# Altium PCB 8161芯片-FSK调试板V1.26.PcbDoc
Units mil, origin at the board's own origin, x right, y up, seen from the top; angles counter-clockwise.
Board outline 1181.1 x 1181.61 mil, 2 copper layers (Top Layer, Bottom Layer), stack 39.414 mil thick; 63 components, 49 nets, 207 pads, 86 vias.
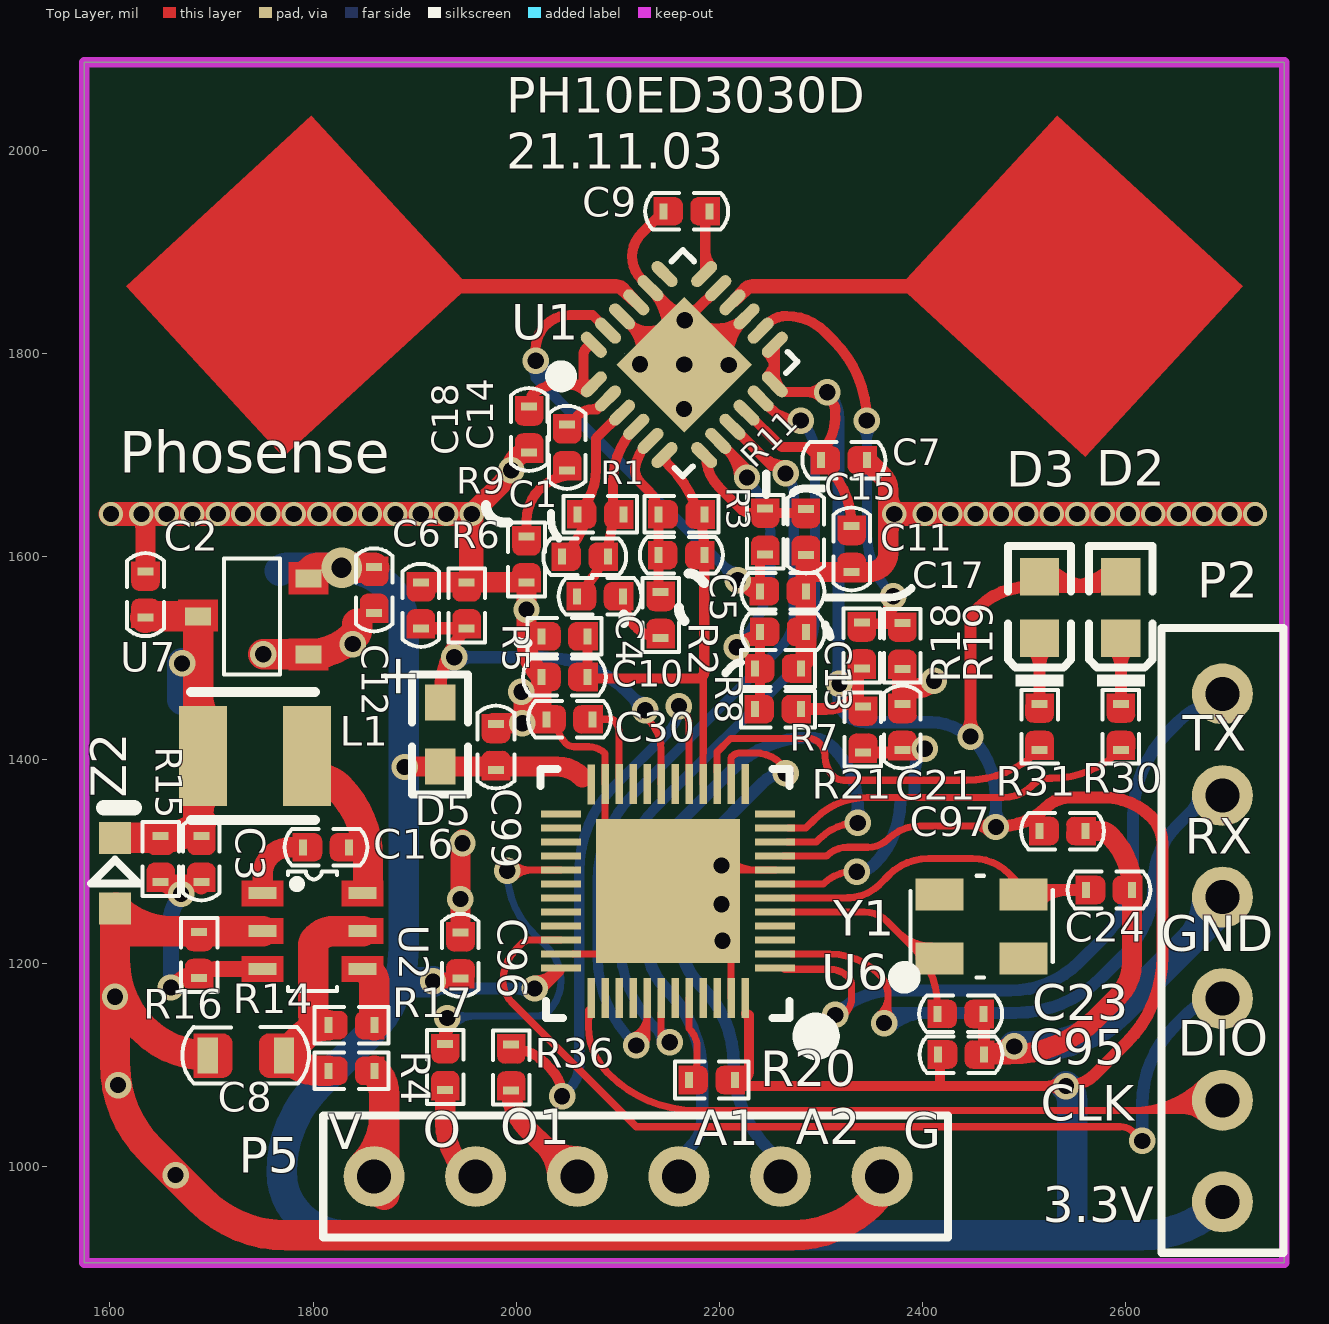
[diagram p0: Top Layer view]
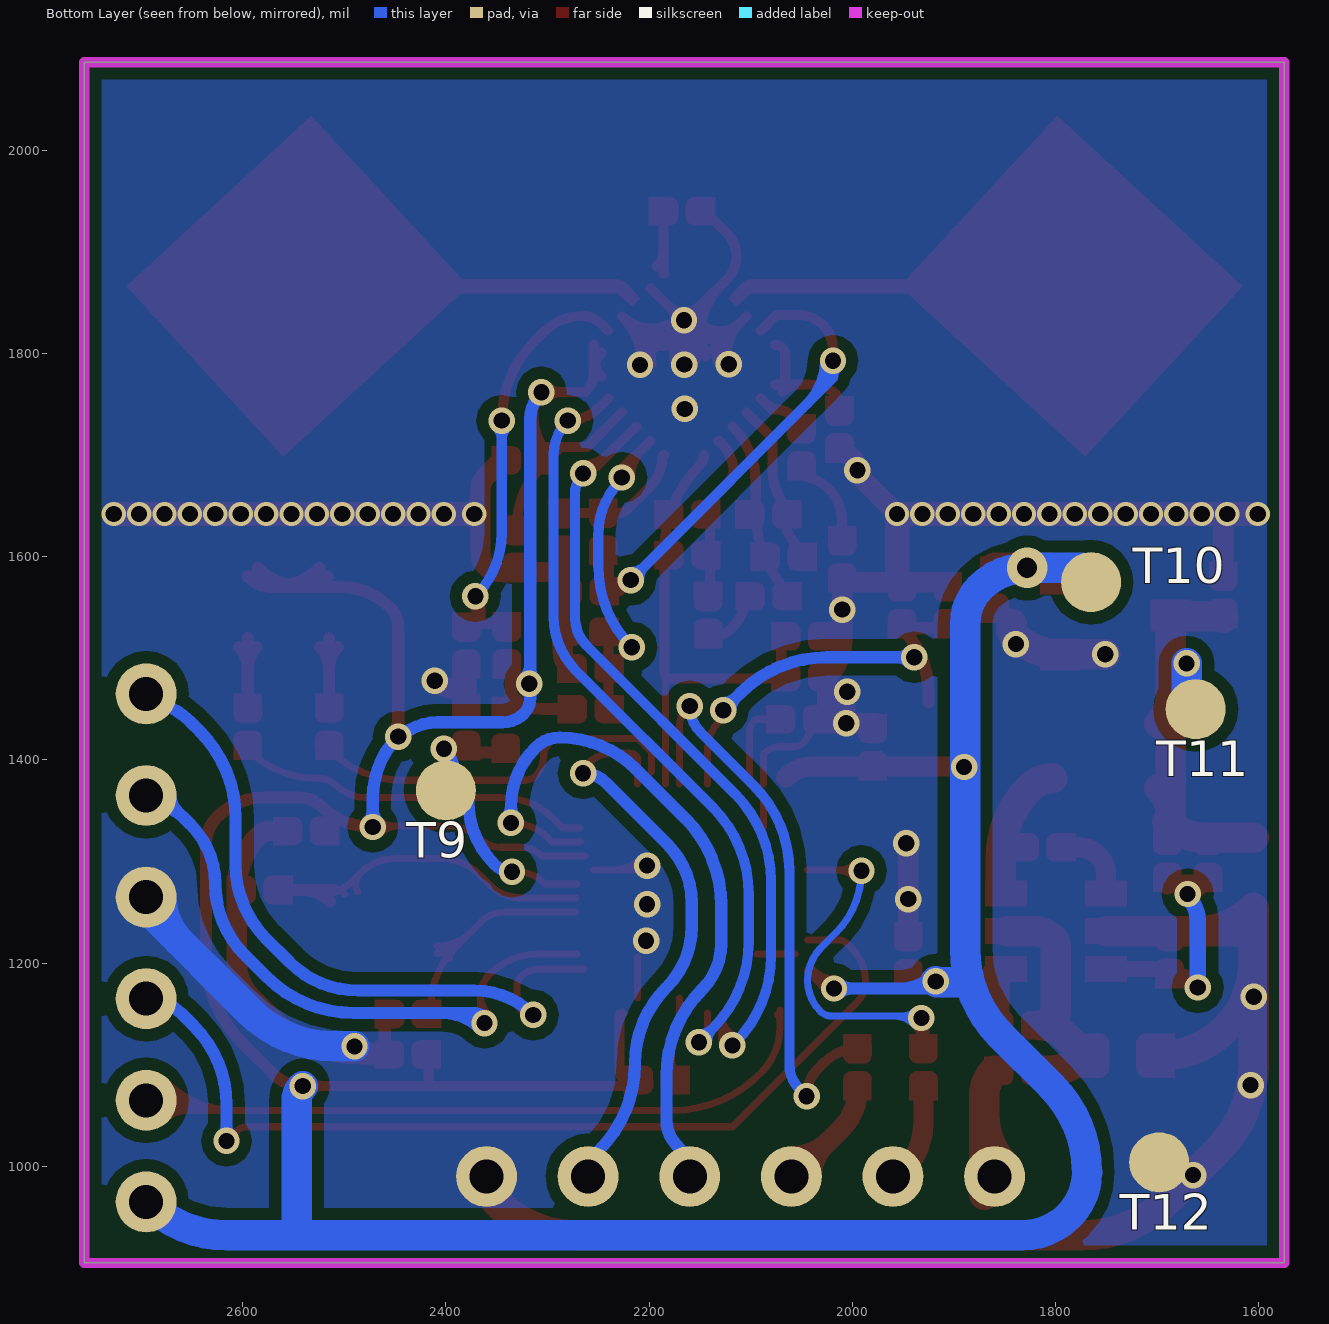
[diagram p1: Bottom Layer view, seen from below]

## Layer stack, top to bottom
Top Layer: signal copper 1.4
Dielectric: core 36.6142, FR-4, Dk 4.8
Bottom Layer: signal copper 1.4

## Board outline
1574.8,2086.61 2755.91,2086.61 2755.91,905 1574.8,905 1574.8,2086.61

## Design rules (kind name [scope] priority, off if disabled: settings)
Clearance [All] p1: gap=6
ComponentClearance [All] p1: gap=10 collisioncheckmode=3 verticalgap=10
PolygonConnect [All] p1: connectstyle=Direct reliefconductorwidth=10 reliefentries=4 polygonreliefangle="90 Angle"
RoutingVias [All] p1: holewidth=28 width=50 viastyle="Through Hole" minholewidth=15 minwidth=26 maxholewidth=28 maxwidth=50
SolderMaskExpansion [All] p1: expansion=4
TestPointUsage [All] p1: valid=0 allowmultiple=FALSE
Testpoint [All] p1: side=15 testpointundercomponent=TRUE minsize=40 maxsize=100 preferedsize=60 minholesize=0 maxholesize=40 preferedholesize=32 testpointgrid=1 style=1023 order=0-112345678
Width [All] p1: maxlimit=30 minlimit=7 preferedwidth=10
18 further rules are at their usual default settings.

## Components (designator, comment, footprint, x,y, rotation, side; value= is the part's Value field where it differs from the comment)
C1 "10nF" C0402#1 2090,1600 r180 top (schematic designator C16)
C2 "10uF" C0402#1 1635,1540 r90 top (schematic designator C16)
C3 "22pF" C0402#1 1690,1280 r90 top (schematic designator C16)
C4 "10uF" C0402#1 2105,1561 r180 top (schematic designator C16)
C5 "51nF" C0402#1 2185,1601.61 r180 top (schematic designator C16)
C6 "0.1uF" C0402#1 1906.1,1529.53 r90 top (schematic designator C16)
C7 "100nF" C0402#1 2345,1695 r180 top (schematic designator C16)
C8 "10uF/16V" C0603 1770.3,1109 r180 top
C9 "10uF" C0402#1 2145,1940 r0 top (schematic designator C16)
C10 "0.1uF" C0402#1 2070,1481.61 r180 top
C11 "10uF" C0402#1 2330,1585 r90 top (schematic designator C16)
C12 "10uF" C0402#1 1860,1590 r270 top (schematic designator C16)
C13 "10uF" C0402#1 2240,1526 r0 top (schematic designator C16)
C14 "10uF" C0402#1 2050,1685 r90 top (schematic designator C16)
C15 "10uF" C0402#1 2285,1647 r270 top (schematic designator C16)
C16 "0.1uF" C0402#1 1835.3,1314 r180 top
C17 "10uF" C0402#1 2285,1566 r180 top (schematic designator C16)
C18 "10uF" C0402#1 2012.61,1702.61 r90 top (schematic designator C16)
C21 "100nF" C0402#2 2380,1455 r270 top
C23 "12pF" C0402#2 2460,1150 r180 top
C24 "12pF" C0402#2 2606,1272 r180 top
C30 "100nF" C0402#2 2075,1440 r180 top
C95 "10uF/6.3V" C0402#2 2415,1110 r0 top
C96 "0.1uF/50V" C0402#2 1945,1185 r90 top
C97 "0.1uF/50V" C0402#2 2515,1330 r0 top
C99 "0.1uF/50V" C0402#2 1980,1390 r90 top
D2 "红灯" LC-0603_LED_S1 2595,1550 r90 top
D3 "绿灯" LC-0603_LED_S1 2515,1550 r90 top
D5 "PT19-21C" LED-0603 1925,1425 r270 top
L1 "PRS3015-100MT" PRS3015 1798,1404 r180 top
P2 "DIP1X6-2.54mm" DIP1X6-2.54 2695,965 r90 top locked
P5 "DIP1X6-2.54mm" DIP1X6-2.54 1860,990 r0 top locked
R1 "100k" R0402#1 2060,1641.61 r0 top (schematic designator R14)
R2 "10k" R0402#1 2142,1520 r90 top (schematic designator R14)
R3 "NC" R0402#1 2140,1641.61 r0 top (schematic designator R14)
R4 "5.6" R0402#1 1860.3,1094 r180 top (schematic designator R14)
R5 "12K" R0402#1 2070,1521.61 r180 top (schematic designator R14)
R6 "47k" R0402#1 1951.1,1529.53 r90 top (schematic designator R14)
R7 "20k" R0402#1 2280,1450 r180 top (schematic designator R14)
R8 "10k" R0402#1 2235,1490 r0 top (schematic designator R14)
R9 "0R" R0402#1 2010,1620 r270 top (schematic designator R14)
R11 "10k" R0402#1 2245,1602 r90 top (schematic designator R14)
R14 "47k" R0402#1 1860.3,1139 r180 top
R15 "25.5k" R0402#1 1650,1280 r90 top
R16 "5.1k" R0402#1 1687.8,1230.66 r270 top
R17 "200" R0402#1 1930,1075 r90 top (schematic designator R14)
R18 "10k/NA" R0402#1 2340,1490 r90 top (schematic designator R14)
R19 "10K/NA" R0402#1 2380,1535 r270 top (schematic designator R14)
R20 "4.7K" R0402#2 2215,1085 r180 top
R21 "4.7KΩ" R0402#2 2341.14,1407.2 r90 top
R30 "1KΩ" R0402#2 2595,1410 r90 top
R31 "1KΩ" R0402#2 2515,1410 r90 top
R36 "100R" R0402#2 1995,1120 r270 top
T9 "" TestPoints 2405,1365 r180 bottom
T10 "" TestPoints 1770,1570 r180 bottom (schematic designator T9)
T11 "" TestPoints 1667,1445 r180 bottom (schematic designator T9)
T12 "" TestPoints 1703,999 r180 bottom (schematic designator T9)
U1 "XBR8161" QFN24 2226.6,1839.25 r45 top (schematic designator QFN-1)
U2 "SY8120B1ABC" SOT-23-6 1750.3,1269 r0 top
U6 "HC32F460JEUA-QFN48TR" QFN48-5X5mm 2254,1271 r180 top
U7 "ME6216A33M3G" SOT-23-L 1795.3,1504 r180 top (schematic designator U6)
Y1 "8MHZ-1C208000CE0R" OSC-SMD_3225 2458,1236 r0 top
Z2 "ESD5Z5.0T1G" SOD323 1605,1335 r270 top

## Footprints (in the part's own frame and the unit in brackets; to place one, negate y for a bottom-side part, rotate by r counter-clockwise, add the part's x,y. Pads: shape width x height; smd on the part's side, far side on the other; paste and mask are expansions set on the pad)
C0402#1 [mm]
  rect 0.2x0.4 smd: 1(0,0) 2(1.15,0)
  Top Layer region: 0.873,0.352 0.873,-0.351 1.401,-0.351 1.401,0.352
  Top Layer region: -0.252,0.352 -0.252,-0.351 0.276,-0.351 0.353,-0.336 0.418,-0.292 0.461,-0.227 0.477,-0.151 0.477,-0.151 0.477,0.152 0.461,0.228 0.418,0.293 0.353,0.337 0.276,0.352 0.276,0.352
  Top Layer region: 1.402,-0.352 1.402,0.351 0.874,0.351 0.797,0.336 0.732,0.292 0.689,0.227 0.673,0.151 0.673,0.151 0.673,-0.152 0.689,-0.228 0.732,-0.293 0.797,-0.337 0.874,-0.352 0.874,-0.352
  silkscreen extent -0.46,-0.46 1.61,0.46, body extent 0.08,-0.3 1.08,0.3, height 0.2
C0402#2 [mm]
  rect 0.2x0.4 smd: 1(0,0) 2(1.15,0)
  Top Layer region: -0.252,0.352 -0.252,-0.351 0.276,-0.355 0.354,-0.34 0.421,-0.295 0.465,-0.229 0.481,-0.151 0.477,-0.151 0.481,0.152 0.465,0.23 0.421,0.296 0.354,0.34 0.276,0.356 0.276,0.352
  Top Layer region: 1.402,-0.352 1.402,0.351 0.874,0.355 0.796,0.34 0.729,0.295 0.685,0.229 0.669,0.151 0.673,0.151 0.669,-0.152 0.685,-0.23 0.729,-0.296 0.796,-0.34 0.874,-0.356 0.874,-0.352
  silkscreen extent -0.46,-0.46 1.61,0.46, body extent 0.08,-0.3 1.08,0.3, height 0.2
C0603 [mil]
  rect 19.8x35.55 smd mask+0: 1(-0.92,0) 2(74,0)
  Top Layer region: 13.34,-21.73 14.89,-21.61 16.39,-21.25 17.82,-20.66 19.14,-19.85 20.32,-18.84 21.33,-17.66 22.14,-16.34 22.73,-14.91 23.09,-13.4 23.21,-11.86 23.18,-11.86 23.21,11.88 23.09,13.43 22.73,14.93 22.14,16.36 21.33,17.68 20.32,18.86 19.14,19.87 17.82,20.68 16.39,21.27 14.89,21.63 13.34,21.75 13.34,21.72 -14.73,21.72 -14.73,-21.7
  Top Layer region: 59.72,-21.73 58.17,-21.61 56.67,-21.25 55.24,-20.66 53.92,-19.85 52.74,-18.84 51.73,-17.66 50.92,-16.34 50.33,-14.91 49.97,-13.4 49.85,-11.86 49.88,-11.86 49.85,11.88 49.97,13.43 50.33,14.93 50.92,16.36 51.73,17.68 52.74,18.86 53.92,19.87 55.24,20.68 56.67,21.27 58.17,21.63 59.72,21.75 59.72,21.72 87.79,21.72 87.79,-21.7
  silkscreen extent -25,-28 99,28, body extent 6,-15 68,16, height 12
DIP1X6-2.54 [mil]
  round 60 hole 33.46: 1(0,0) 2(100,0) 3(200,0) 4(300,0) 5(400,0) 6(500,0)
  silkscreen extent -50,-60 565,60
LC-0603_LED_S1 [mm]
  rect 0.93x0.98 smd: A(0.77,0) K(-0.77,0)
  silkscreen extent -1.97,-0.79 1.54,0.79, body extent -0.8,-0.4 0.8,0.4, height 0.6
LED-0603 [mm]
  rect 0.9x0.762 smd: 1(-0.8,0) 2(0.8,0)
  silkscreen extent -1.5,-0.7 1.5,0.7
OSC-SMD_3225 [mm] "OSC-SMD-3225"
  rect 1.2x0.8 smd: 1(-1.05,-0.8) 2(1.05,-0.8) 3(1.05,0.8) 4(-1.05,0.8)
  silkscreen extent -1.98,-1.37 1.78,1.27
PRS3015 [mm]
  rect 1.2x2.5 smd: 1(0.1,0) 2(2.7,0)
  silkscreen extent -0.1,-1.6 3,1.6, body extent -0.1,-1.5 2.9,1.5, height 1.5
QFN24 [mm]
  oval 0.8x0.3 smd: 1(-3.95,1.45) 2(-3.95,0.95) 3(-3.95,0.45) 4(-3.95,-0.05) 5(-3.95,-0.55) 6(-3.95,-1.05) 13(-0.05,-1.05) 14(-0.05,-0.55) 15(-0.05,-0.05) 16(-0.05,0.45) 17(-0.05,0.95) 18(-0.05,1.45)
  oval 0.3x0.8 smd: 7(-3.25,-1.75) 8(-2.75,-1.75) 9(-2.25,-1.75) 10(-1.75,-1.75) 11(-1.25,-1.75) 12(-0.75,-1.75) 19(-0.75,2.15) 20(-1.25,2.15) 21(-1.75,2.15) 22(-2.25,2.15) 23(-2.75,2.15) 24(-3.25,2.15)
  rect 2.4x2.4 smd: 25(-2,0.2)
  silkscreen extent -4.59,-1.75 0.05,2.37
QFN48-5X5mm [mm] "QFN48-5X5mm"
  rect 1x0.18 smd: 1(-0.02,1.925) 2(-0.02,1.575) 3(-0.02,1.225) 4(-0.02,0.875) 5(-0.02,0.525) 6(-0.02,0.175) 7(-0.02,-0.175) 8(-0.02,-0.525) 9(-0.02,-0.875) 10(-0.02,-1.225) 11(-0.02,-1.575) 12(-0.02,-1.925) 25(5.33,-1.925) 26(5.33,-1.575) 27(5.33,-1.225) 28(5.33,-0.875) 29(5.33,-0.525) 30(5.33,-0.175) 31(5.33,0.175) 32(5.33,0.525) 33(5.33,0.875) 34(5.33,1.225) 35(5.33,1.575) 36(5.33,1.925)
  rect 0.18x1 smd: 13(0.73,-2.675) 14(1.08,-2.675) 15(1.43,-2.675) 16(1.78,-2.675) 17(2.13,-2.675) 18(2.48,-2.675) 19(2.83,-2.675) 20(3.18,-2.675) 21(3.53,-2.675) 22(3.88,-2.675) 23(4.23,-2.675) 24(4.58,-2.667) 37(4.58,2.675) 38(4.23,2.675) 39(3.88,2.675) 40(3.53,2.675) 41(3.18,2.675) 42(2.83,2.675) 43(2.48,2.675) 44(2.13,2.675) 45(1.78,2.675) 46(1.43,2.675) 47(1.08,2.675) 48(0.73,2.675)
  rect 3.6x3.6 smd: 49(2.655,0)
  silkscreen extent -1.07,-3.05 5.84,3.7
R0402#1 [mm]
  rect 0.2x0.4 smd: 1(0,0) 2(1.15,0)
  Top Layer region: 0.873,0.352 0.873,-0.351 1.401,-0.351 1.401,0.352
  Top Layer region: -0.252,0.352 -0.252,-0.351 0.276,-0.351 0.353,-0.336 0.418,-0.292 0.461,-0.227 0.477,-0.151 0.477,-0.151 0.477,0.152 0.461,0.228 0.418,0.293 0.353,0.337 0.276,0.352 0.276,0.352
  Top Layer region: 1.402,-0.352 1.402,0.351 0.874,0.351 0.797,0.336 0.732,0.292 0.689,0.227 0.673,0.151 0.673,0.151 0.673,-0.152 0.689,-0.228 0.732,-0.293 0.797,-0.337 0.874,-0.352 0.874,-0.352
  silkscreen extent -0.35,-0.46 1.5,0.46, body extent 0.12,-0.26 1.12,0.24, height 0.35
R0402#2 [mm]
  rect 0.2x0.4 smd: 1(0,0) 2(1.15,0)
  Top Layer region: 1.402,-0.352 1.402,0.351 0.874,0.355 0.796,0.34 0.729,0.295 0.685,0.229 0.669,0.151 0.673,0.151 0.669,-0.152 0.685,-0.23 0.729,-0.296 0.796,-0.34 0.874,-0.356 0.874,-0.352
  Top Layer region: -0.252,0.352 -0.252,-0.351 0.276,-0.355 0.354,-0.34 0.421,-0.295 0.465,-0.229 0.481,-0.151 0.477,-0.151 0.481,0.152 0.465,0.23 0.421,0.296 0.354,0.34 0.276,0.356 0.276,0.352
  silkscreen extent -0.35,-0.46 1.5,0.46, body extent 0.12,-0.26 1.12,0.24, height 0.35
SOD323 [mm]
  rect 0.8x0.8 smd: A(2.06,0) K(0.3,0)
  silkscreen extent 0.84,-0.6 1.44,0.6, body extent -0.17,-0.62 2.53,0.63, height 1.1
SOT-23-6 [mm]
  rect 0.7x0.3 smd: 1(0,0) 2(0,-0.95) 3(0,-1.9) 4(2.5,-1.9) 5(2.5,-0.95) 6(2.5,0)
  Top Layer region: 1.972,-2.226 3.025,-2.226 3.025,-1.573 1.972,-1.573
  Top Layer region: 1.972,-0.341 3.025,-0.341 3.025,0.311 1.972,0.311
  Top Layer region: -0.527,-2.226 0.526,-2.226 0.526,-1.573 -0.527,-1.573
  Top Layer region: -0.527,-1.276 0.526,-1.276 0.526,-0.623 -0.527,-0.623
  Top Layer region: -0.527,-0.341 0.526,-0.341 0.526,0.312 -0.527,0.312
  Top Layer region: 1.972,-1.276 3.025,-1.276 3.025,-0.623 1.972,-0.623
  silkscreen extent 0.63,-2.45 1.86,0.54, body extent -0.16,-2.39 2.64,0.51, height 1.45
SOT-23-L [mm]
  rect 0.65x0.45 smd: 1(0,0) 2(0,-1.9) 3(2.757,-0.95)
  Top Layer region: -0.507,-0.398 0.496,-0.398 0.496,0.405 -0.507,0.405
  Top Layer region: -0.507,-2.303 0.496,-2.303 0.496,-1.5 -0.507,-1.5
  Top Layer region: 2.254,-1.367 3.257,-1.367 3.257,-0.564 2.254,-0.564
  silkscreen extent 0.71,-2.4 2.11,0.5, body extent 0.17,-2.44 2.67,0.56, height 1.05
TestPoints [mil] "TestPoints"
  round 59.06 smd: 1(5,5)

## Part data
C1 C2 C3 C4 C5 C6 C7 C8 C9 C10 C11 C12 C13 C14 C15 C16 C17 C18 C30: library part Cap, "Capacitor"
C21: library part "0402 100nF (104) 10% 16V", "贴片电容"
C23 C24: library part "0402 22pF (220) 5% 50V", "贴片电容"
C95 C96 C97 C99: library part "0402 2.2nF (222) 10% 50V", "贴片电容"
D2 D3: library part "0603 红灯", "发光二极管"
D5: library part "Photo Sen", "Photosensitive Diode"
L1: library part Inductor, "Inductor"
R1 R2 R3 R4 R5 R6 R7 R8 R9 R11 R14 R15 R16 R17 R18 R19 R20: library part Res2, "Resistor"
R21 R36: library part "0402 4.7KΩ (4701) 1%", "贴片电阻"
R30 R31: library part "0402 1KΩ (1001) 1%", "贴片电阻"
T9 T10 T11 T12: library part TestPoints, "TestPoints"
U1: library part XBR1000
U2: library part H9108
U6: library part HC32F460JETA-LQFP48
U7: library part SSP6206
Y1: library part "SMD-3225_4P  25MHZ 12PF 10PPM", "贴片晶振"
Z2: library part "D Zener", "Zener Diode"

## Via types
v1: diameter 26, hole 16, Top Layer to Bottom Layer, tented both sides, 55 vias
v2: diameter 24, hole 16, Top Layer to Bottom Layer, tented both sides, 30 vias
v3: diameter 40, hole 20, Top Layer to Bottom Layer, tented both sides, 1 vias

## Nets (pads, with @x,y where several pads share a name; then routed paths per layer and width w, separated by ;. In a path a pad name is that pad's centre, name@x,y a point inside that pad or via, vN(x,y) a via of type N, cw(c..) or ccw(c..) an arc to the next point about the centre after c; other vN are vias at no path point)
3.3V: C7.2 C11.2 C12.1 C95.1 C96.1 C97.1 C99.1 D2.A D3.A D5.2 P2.1 R7.1 R18.1 R20.1 R21.2 T10.1 U1.10 U1.12 U1.13 U6.9 U6.24 U6.36 U6.48 U7.2 | length 5711.4
  Top Layer w7: U6.9@2263,1305.45 2305.45,1305.45 cw(c2326.09,1284.81) 2326.09,1314 2346.27,1314 ccw(c2346.27,1342.31) 2366.29,1322.29 cw(c2396.97,1291.62) 2396.97,1335 v1@2476,1335 ; 2446.65,1335 cw(c2446.65,1308.65) 2465.28,1327.28 ccw(c2446.65,1308.65) 2446.65,1335 ; 2451.48,1335 ccw(c2451.48,1354.52) 2465.28,1340.72 cw(c2451.48,1354.52) 2451.48,1335
  Top Layer w10: R20.1@2214,1079 v1(2541,1079) ; 2224.94,1085 ccw(c2215.08,1094.82) 2229,1094.82 2229,1149 ; U6.48@2226.29,1150.57 cw(c2219.75,1144.03) 2229,1144.03 ; U1.10 cw(c2226.6,1740.39) 2227.61,1741.39 2259.38,1709.62 ; U1.13 2254.44,1781.25 ccw(c2280.25,1781.25) 2262,1763 ccw(c2264.41,1765.41) 2264.41,1762 2288.27,1762 ; 2259.37,1709.63 ccw(c2263.3,1713.55) 2263.3,1708 2303,1708 ; 2287,1708 ccw(c2287.67,1708) 2287.19,1707.53 2305.64,1689.08 cw(c2246.83,1630.28) C11.2 ; C7.2@2298.15,1700.15 ccw(c2259.89,1738.41) 2313.78,1743.32 ; 2314,1743.34 ccw(c2300.34,1743.34) 2310,1753 ccw(c2288.27,1731.27) 2288.27,1762 ; 2417,1079 C95.1@2417,1105.17 ; 2286.69,1762 ccw(c2286.69,1781.31) 2300.34,1767.66 cw(c2286.69,1781.31) 2286.69,1762 ; 2286.69,1762 cw(c2286.69,1742.69) 2300.34,1756.34 ccw(c2286.69,1742.69) 2286.69,1762 ; 2288.27,1762 ccw(c2288.27,1777.64) 2300,1767.29 cw(c2288.27,1777.64) 2288.27,1762 ; 2288.27,1762 cw(c2288.27,1746.36) 2300,1756.71 ccw(c2288.27,1746.36) 2288.27,1762 ; C95.1@2417,1105.17 ccw(c2410.17,1105.17) C95.1 cw(c2410.17,1105.17) C95.1@2417,1105.17 ; 2521.69,1079 ccw(c2521.69,1098.31) 2535.34,1084.66 cw(c2521.69,1098.31) 2521.69,1079 ; 2521.69,1079 cw(c2521.69,1059.69) 2535.34,1073.34 ccw(c2521.69,1059.69) 2521.69,1079 ; U1.12@2246.84,1777.25 ccw(c2228.49,1795.6) 2254.44,1795.6 cw(c2228.49,1795.6) U1.12@2246.84,1777.25 ; U1.13@2246.84,1801.02 cw(c2228.49,1782.68) 2254.44,1782.68 ccw(c2228.49,1782.68) U1.13@2246.84,1801.02 ; U1.13@2253.91,1808.1 cw(c2252.63,1806.82) 2254.44,1806.82 ccw(c2252.63,1806.82) U1.13@2253.91,1808.1 ; 2294.82,1699.91 ccw(c2299.72,1704.81) 2299.72,1697.87 cw(c2299.72,1704.81) 2294.82,1699.91 ; C7.2@2299.72,1692.13 cw(c2299.72,1685.19) 2304.63,1690.09 ccw(c2299.72,1685.19) C7.2@2299.72,1692.13
  Top Layer w12: v1(1918,1182) cw(c1925.24,1174.76) 1925.24,1185 C96.1 ; v1(2018,1175) ccw(c2018,1189.35) 2028.15,1179.2 U6.36@2041.39,1192.45 ; R7.1 2304.73,1450 ccw(c2304.73,1491.68) 2334.21,1462.21 ; 2336.14,1460.28 2336.14,1495 ; v1(2447,1423) 2447,1530.69 cw(c2474.31,1530.69) 2455,1550 cw(c2504.05,1500.95) 2504.05,1570.32 2570.86,1570.32 ; v1@2476,1335 2477.54,1335 ccw(c2477.54,1396.46) 2521,1353 cw(c2545.14,1328.86) 2545.14,1363 2579.13,1363 cw(c2579.13,1298.13) 2625,1344 cw(c2598.44,1317.44) 2636,1317.44 2636,1207 cw(c2515.29,1207) 2600.64,1121.64 2570.02,1091.02 cw(c2541,1120.04) v1(2541,1079) ; D3.A@2516.2,1580.53 ccw(c2540.87,1605.2) 2540.87,1570.32 ; D3.A@2524.69,1589.02 ccw(c2569.84,1634.17) 2569.84,1570.32 ; 2540.16,1570.32 ccw(c2540.16,1634.17) D2.A@2585.31,1589.02 ; 2569.13,1570.32 ccw(c2569.13,1605.2) D2.A@2593.8,1580.53 ; D2.A@2581.72,1580.78 cw(c2570.86,1581.18) 2570.86,1570.32 ; D2.A cw(c2570.86,1604.46) 2570.86,1570.32 ; 2447,1439.9 ccw(c2463.9,1439.9) 2451.95,1427.95 cw(c2463.9,1439.9) 2447,1439.9 ; 2447,1439.9 cw(c2430.1,1439.9) 2442.05,1427.95 ccw(c2430.1,1439.9) 2447,1439.9 ; v1@1922.95,1177.05 cw(c1942.14,1157.86) 1942.14,1185 ccw(c1942.14,1157.86) v1@1922.95,1177.05 ; v1@2018,1182 ccw(c2018,1213.25) 2040.1,1191.15 cw(c2018,1213.25) v1@2018,1182
  Top Layer w20: v1@1892,1395 ccw(c1895.61,1398.61) 1895.61,1393.5 2039.64,1393.5 cw(c2039.64,1357.64) 2065,1383
  Top Layer w30: U7.2 cw(c1806.15,1578.8) 1798.48,1586.48 cw(c1804.57,1580.39) 1804.57,1589 C12.1@1860,1589 ; U7.2@1794.89,1583.15 cw(c1809.03,1569.01) 1809.03,1589 ccw(c1809.03,1569.01) U7.2@1794.89,1583.15
  Bottom Layer w12: 1891,1181 ccw(c1905.49,1195.49) 1905.49,1175 v1(2018,1175) ; v1(2306,1762) cw(c2279.44,1735.44) 2317,1735.44 2317,1461 ; v1(2318,1475) 2317,1461 ; v1@2447,1421 ccw(c2408.37,1382.37) 2408.37,1437 2344.21,1437 cw(c2344.21,1466.49) 2323.36,1445.64 cw(c2338.73,1461) 2317,1461 ; v1(2447,1423) cw(c2386.64,1362.64) 2472,1362.64 v1(2472,1334) ; 2001.1,1175 ccw(c2001.1,1191.9) 2013.05,1179.95 cw(c2001.1,1191.9) 2001.1,1175 ; 2001.1,1175 cw(c2001.1,1158.1) 2013.05,1170.05 ccw(c2001.1,1158.1) 2001.1,1175 ; 2317,1460.97 ccw(c2304.59,1460.97) 2313.16,1469.94 cw(c2304.59,1460.97) 2317,1460.97 ; 2317,1460.96 cw(c2326.31,1460.96) 2321.57,1468.98 ccw(c2326.31,1460.96) 2317,1460.96 ; 2317,1461 ccw(c2306.46,1461.75) 2313.4,1469.72 cw(c2306.46,1461.75) 2317,1461 ; 2317,1461 cw(c2327.54,1460.25) 2321.8,1469.12 ccw(c2327.54,1460.25) 2317,1461 ; 2472,1350.9 ccw(c2488.9,1350.9) 2476.95,1338.95 cw(c2488.9,1350.9) 2472,1350.9 ; 2472,1350.9 cw(c2455.1,1350.9) 2467.05,1338.95 ccw(c2455.1,1350.9) 2472,1350.9 ; v1@1922.95,1186.95 ccw(c1951.8,1215.8) 1951.8,1175 cw(c1951.8,1215.8) v1@1922.95,1186.95 ; v1@2313.05,1479.95 ccw(c2303.51,1489.49) 2317,1489.49 cw(c2303.51,1489.49) v1@2313.05,1479.95 ; 2317,1494.31 ccw(c2337.31,1494.31) 2322.95,1479.95 cw(c2337.31,1494.31) 2317,1494.31
  Bottom Layer w30: T10.1@1767,1586 cw(c1774.24,1578.76) 1774.24,1589 v3(1828,1589) cw(c1828,1523.82) 1874.09,1569.91 cw(c1838.1,1533.92) 1889,1533.92 1889,1214 cw(c1768.29,1214) 1853.64,1128.64 1804.36,1079.36 ccw(c1889.71,994) 1769,994 ccw(c1829.36,994) 1786.68,951.32 ccw(c1833.33,997.97) 1833.33,932 2615.33,932 ccw(c2615.33,1044.67) P2.1 ; 1891,1181 1915.59,1181 ccw(c1915.59,1184.41) v1(1918,1182) ; v1(2541,1079) cw(c2526.51,1064.51) 2547,1064.51 2547,932
  other v1: 1890,1393
3.6V: C2.1 C3.2 L1.2 R15.2 T11.1 U7.3 Z2.K | length 497.3
  Top Layer w30: Z2.K 1651.83,1323.19 ccw(c1651.83,1377.17) 1690,1339 cw(c1697.83,1346.83) 1686.76,1346.83 U7.3 1638.38,1541.4 ccw(c1638.38,1536.62) C2.1 ; 1686.76,1346.45 cw(c1722.56,1346.45) 1697.69,1372.21 ccw(c1722.56,1346.45) 1686.76,1346.45 ; 1686.76,1462.34 ccw(c1724.45,1462.34) 1697.8,1435.69 cw(c1724.45,1462.34) 1686.76,1462.34
  Bottom Layer w30: T11.1@1671,1459 v1(1671,1495)
5-15V: P5.1 R4.1 | length 235.1
  Top Layer w30: R4.1 cw(c1836.88,1070.58) 1870,1070.58 P5.1@1870,972 ; P5.1@1849.39,1000.61 ccw(c1799.64,1050.36) 1870,1050.36 cw(c1799.64,1050.36) P5.1@1849.39,1000.61
ADC1: P5.4 U6.10 | length 773.4
  Top Layer w7: U6.10@2267,1319.23 2295.23,1319.23 ; 2295.45,1319.45 2298.44,1322.44 cw(c2336,1284.89) v1(2336,1338) ccw(c2336,1326.12) v1@2327.6,1334.52
  Bottom Layer w12: P5.4 cw(c2203.46,990) 2172.73,1020.73 ccw(c2147.93,1045.53) 2183,1045.53 2183,1089 ccw(c2062.29,1089) 2147.64,1174.36 cw(c2192.66,1219.37) 2129,1219.37 2129,1257 cw(c2249.71,1257) 2164.36,1342.36 2212.89,1390.89 cw(c2288,1315.77) 2288,1422 cw(c2288,1388.2) 2311.9,1412.1 cw(c2253.72,1353.92) 2336,1353.92 ; v1(2336,1338) 2336,1353.92 ; 2336,1353.92 ccw(c2350.59,1353.92) 2340.73,1343.16 cw(c2350.59,1353.92) 2336,1353.92 ; 2336,1353.92 cw(c2321.41,1353.92) 2331.27,1343.16 ccw(c2321.41,1353.92) 2336,1353.92
ADC2: P5.5 U6.14 | length 561.4
  Top Layer w7: U6.14 2211.48,1401.69 cw(c2212.23,1401.69) 2211.7,1402.23 2211.74,1402.27 cw(c2212.89,1402.27) 2212.08,1403.08 2213,1404 cw(c2220.24,1396.76) 2220.24,1407 2234.17,1407 cw(c2234.17,1368.79) 2261.19,1395.81 2261.46,1395.54 cw(c2252.93,1387) v1(2265,1387)
  Bottom Layer w12: P5.5 ccw(c2223.79,990) 2249.39,1015.61 2249.36,1015.64 cw(c2334.71,1101) 2214,1101 ccw(c2107.77,1101) 2182.89,1176.11 cw(c2242.97,1236.2) 2158,1236.2 2158,1259.06 cw(c2239.94,1259.06) 2182,1317 2242.81,1377.81 cw(c2265,1355.62) v1(2265,1387)
ADC3: U6.18
FSK_PWM: U1.9 U6.41 | length 859
  Top Layer w7: v1@2114.47,1127.82 ccw(c2105.99,1149) 2128.8,1149 2128.8,1129.8 v1@2117,1118 ; v1@2117.07,1121.32 ccw(c2110.13,1138.66) 2128.8,1138.66 ; v1@2119.67,1114.82 ccw(c2114.27,1128.31) 2128.8,1128.31
  Top Layer w10: U1.9 cw(c2212.68,1726.86) 2213.41,1727.59 2251.46,1689.54 ; 2241.1,1699.9 ccw(c2265,1723.8) 2265,1690 cw(c2265,1723.8) 2241.1,1699.9
  Bottom Layer w10: v1(2118,1119) 2115.36,1121.64 cw(c2200.71,1207) 2080,1207 2080,1281 cw(c2200.71,1281) 2115.36,1366.36 2261.69,1512.69 ccw(c2234.37,1540) 2273,1540 2273,1662.69 ccw(c2250.51,1662.69) 2266.41,1678.59 cw(c2269.83,1682) v1(2265,1682)
GND: C2.2 C6.2 C7.1 C8.2 C9.1 C10.2 C11.1 C12.2 C13.2 C15.2 C17.1 C18.1 C21.1 C23.1 C24.1 C30.2 C95.2 C96.2 C97.2 C99.2 P2.4 P5.6 R5.2 R6.2 R8.2 R9.2 R16.1 R19.2 T12.1 U1.15 U1.17 U1.20 U1.22 U1.25 U2.2 U6.8 U6.23 U6.35 U6.47 U6.49 U7.1 Z2.A | length 6547.4
  Top Layer w7: 2040,1437 ccw(c2068.97,1437) 2048.49,1416.51 ccw(c2056.97,1425) 2056.97,1413 2071.32,1413 cw(c2071.32,1390.48) 2087.24,1406.4 ; U6.35@2056,1209 U6.49@2094,1209 ; U6.49@2087.47,1334 U6.23@2087.47,1360 ; U6.23 2087.46,1406.19 ; U6.49@2203.77,1297.77 ccw(c2218.49,1312.49) U6.49@2218.49,1291.67 ; U6.49@2207,1294 ccw(c2212.63,1299.63) 2212.63,1291.67 U6.8 ; U6.49@2208.72,1289.28 cw(c2214.48,1283.52) U6.49@2214.48,1291.67 ; U6.49@2208.72,1302.72 ccw(c2235.39,1329.39) U6.8@2235.39,1291.67 ; U6.49@2211,1206 cw(c2209.84,1204.84) 2211.48,1204.84 U6.47
  Top Layer w10: U1.22 U1.25@2137,1804 ; C9.1 2123.43,1918.43 ccw(c2146.21,1895.66) 2114,1895.66 ccw(c2146.37,1895.66) 2123.48,1872.77 U1.20 2166,1832 2175,1841 U1.17 ; 2150.85,1846.37 ccw(c2164.94,1861.22) U1.25@2165.48,1840.75 ; 2152.04,1845.24 cw(c2139.55,1832.07) U1.25@2157.7,1832.55 ; U1.25@2165.77,1840.76 ccw(c2165.98,1862.22) 2181.01,1846.9 ; U1.25@2173.69,1832.68 cw(c2190.86,1832.51) 2178.84,1844.77 ; U1.25@2174.15,1809.57 ccw(c2185.45,1835.83) U1.25@2205.62,1815.57 ; U1.25@2178.1,1818.76 ccw(c2191.74,1850.46) U1.15@2216.09,1826 ; U1.25@2182.05,1827.94 ccw(c2198.03,1865.09) 2226.57,1836.43 ccw(c2272.05,1790.75) U1.25@2207.59,1789.77 ; U1.25@2195,1805 U1.15 ; U1.25@2197.59,1789.62 cw(c2239.29,1790.25) 2209.87,1819.8 ; U1.22@2110.85,1829.81 ccw(c2130.19,1849.42) 2144.07,1825.63 cw(c2130.19,1849.42) U1.22@2110.85,1829.81 ; U1.22@2110.85,1829.81 cw(c2080.52,1799.09) 2123.4,1794.06 ccw(c2080.52,1799.09) U1.22@2110.85,1829.81 ; 2120.14,1820.64 ccw(c2137.01,1837.73) 2149.11,1816.99 cw(c2137.01,1837.73) 2120.14,1820.64 ; U1.25@2125.42,1815.43 cw(c2106.3,1796.06) 2133.33,1792.89 ccw(c2106.3,1796.06) U1.25@2125.42,1815.43 ; U1.20@2129.3,1866.81 cw(c2085.56,1820.69) 2144.67,1797.32 ccw(c2085.56,1820.69) U1.20@2129.3,1866.81 ; U1.20@2140.04,1856.62 cw(c2100.39,1814.83) 2153.97,1793.64 ccw(c2100.39,1814.83) U1.20@2140.04,1856.62 ; 2140.09,1935.09 cw(c2145,1930.19) 2145,1937.13 ccw(c2145,1930.19) 2140.09,1935.09 ; 2150.78,1846.44 cw(c2115.23,1808.96) 2163.27,1789.96 ccw(c2115.23,1808.96) 2150.78,1846.44 ; U1.25@2161.52,1836.25 cw(c2130.07,1803.09) 2172.57,1786.29 ccw(c2130.07,1803.09) U1.25@2161.52,1836.25
  Top Layer w12: C23.1 cw(c2459.33,1149.33) 2460.28,1149.33 C95.2
  Top Layer w20: v2@1629.59,1640.59 cw(c1616.51,1627.51) 1635,1627.51 ; C2.2 1635,1633.34 cw(c1647.25,1633.34) v2@1638.59,1642 ; C6.2 2009.81,1574.8 cw(c2009.81,1574.54) R9.2 2010,1517.16 ccw(c2060.27,1517.16) C10.2 2024.72,1451.9 cw(c2007.91,1451.9) 2019.8,1440.02 ; C96.2 1945,1317.17 cw(c1951.83,1317.17) v1@1947,1322 ; v2@1955.71,1642.05 1992.42,1678.76 ccw(c1986.17,1685) v1(1995,1685) cw(c2012.61,1685) C18.1 C18.1@2015,1702.61 ; C99.2@1977,1436 2020.07,1436 ; v1@2004.73,1464.01 cw(c2002.79,1442.16) 2024.72,1442.16 ; v1(2005,1467) cw(c2000.17,1462.17) 2007,1462.17 v1@2007,1436 ; R8.2@2278.78,1491.5 ccw(c2263.75,1506.53) 2285,1506.53 C15.2@2285,1599.72 ; 2285,1585 2346.51,1585 ccw(c2346.51,1605.49) 2361,1591 ccw(c2348.93,1603.07) 2366,1603.07 2366,1666 ccw(c2346.69,1666) 2360.34,1679.66 C7.1 ; C21.1 R19.2@2380,1492 ; 2392.46,1470.32 ccw(c2392.46,1496.54) v1(2411,1478) ; C95.2 2484.98,1109.98 ccw(c2484.98,1230.69) 2570.34,1145.34 2592.06,1167.06 ccw(c2558.41,1200.71) 2606,1200.71 2606,1272.89 ccw(c2530.89,1272.89) 2584,1326 ccw(c2574.34,1316.34) 2574.34,1330 C97.2 ; 1987.29,1673.63 ccw(c1975.93,1685) 1992,1685 cw(c1975.93,1685) 1987.29,1673.63 ; 2366,1622.69 cw(c2391.31,1622.69) 2373.41,1640.59 ccw(c2391.31,1622.69) 2366,1622.69 ; 2366,1661.31 ccw(c2391.31,1661.31) 2373.41,1643.41 cw(c2391.31,1661.31) 2366,1661.31 ; C95.2@2463.4,1109.98 ccw(c2463.4,1144.6) 2487.88,1120.12 cw(c2463.4,1144.6) C95.2@2463.4,1109.98
  Top Layer w24: v2@1600.71,1642.05 1638.59,1642.05 1656,1642.05 1731,1642.05 1756,1642.05 1806,1642.05 1831,1642.05 1906,1642.05 1931,1642.05 1955.71,1642.05 R6.2@1955.71,1575.5 ; v2(1601,1642) 1638.59,1642 v2(1656,1642) v2(1731,1642) v2(1756,1642) v2(1806,1642) v2(1831,1642) v2(1906,1642) v2(1931,1642) v2(1956,1642) ; v2@2371,1642 v2@2726,1642.05 ; v2(2372,1642) v2(2727,1642) ; R6.2@1955.71,1575.5 ccw(c1956.7,1575.5) 1956,1574.8 cw(c1956.7,1575.5) R6.2@1955.71,1575.5
  Top Layer w30: 1605,1202.07 ccw(c1699.32,1202.07) 1632.63,1135.37 ccw(c1696.3,1199.05) C8.2 ; Z2.A 1605,1101 ccw(c1725.71,1101) 1640.36,1015.64 1688.64,967.36 ccw(c1774,1052.71) 1774,932 2271.19,932 ccw(c2271.19,1042.6) 2349.39,964.39 ccw(c2323.79,990) P5.6 P5.6@2360,987.65 ; U2.2 1606.44,1231.6 ; v1(1751,1504) U7.1 ccw(c1795.3,1568.46) 1840.88,1522.88 ccw(c1835.08,1528.68) 1843.28,1528.68 1843.28,1533.8 ; 1606.44,1231.6 ccw(c1606.44,1229.56) 1605,1231 cw(c1606.44,1229.56) 1606.44,1231.6 ; Z2.A@1605.53,1254.43 ccw(c1660.64,1309.54) 1660.64,1231.6 cw(c1660.64,1309.54) Z2.A@1605.53,1254.43
  Bottom Layer w20: v1@2164,1747.96 ccw(c2167.46,1747.96) v1(2165.01,1745.52) ; v1@2207.33,1789.48 cw(c2207.33,1787.15) v1(2208.97,1788.8)
  Bottom Layer w30: v1(2490,1118) 2509,1118 ccw(c2509,1238.71) 2594.36,1153.36 2687.22,1246.22 ccw(c2668.44,1265) P2.4 ; 2661.62,1220.62 ccw(c2617.23,1265) 2680,1265 cw(c2617.23,1265) 2661.62,1220.62
  other v1: 1664.62,991.38 1608,1080 1605,1167 2203,1222 2202,1258 1945,1263 2202,1296 1947,1318 2006,1436 1839,1514 2010,1548 2121.73,1789.48 2165.35,1789.14 2165.7,1832.76
  other v2: 1631,1642 1681,1642 1706,1642 1781,1642 1856,1642 1881,1642 2402,1642 2427,1642 2452,1642 2477,1642 2502,1642 2527,1642 2552,1642 2577,1642 2602,1642 2627,1642 2652,1642 2677,1642 2702,1642
GREEN_LED: R31.1 U6.15 | length 375.6
  Top Layer w7: U6.15@2197.7,1388 2197.7,1408 2210.7,1421 2288,1421 cw(c2288,1406.51) 2298.24,1416.76 cw(c2284.34,1402.86) 2304,1402.86 ccw(c2330.21,1402.86) 2311.68,1384.32 ccw(c2322.11,1394.76) 2322.11,1380 2442.57,1380 ccw(c2442.57,1482.43) R31.1
IFCAP: C17.2 R11.1 U1.23 | length 785.6
  Top Layer w10: v1(2019,1793) 2019,1804 cw(c2053,1804) 2053,1838 2075,1838 U1.23 ; v1(2218,1577) 2226.54,1568.46 ccw(c2239.72,1581.65) 2239.72,1563 R11.1@2239.72,1604
  Bottom Layer w10: v1(2019,1793) 2019,1776 ; v1(2218,1577) 2019,1776 ; v1@2013.9,1786.84 cw(c2004.94,1776) 2019,1776 ; v1@2013.9,1786.84 cw(c2004.94,1776) 2019,1776 ; v1@2013.9,1786.84 cw(c2004.94,1776) 2019,1776 ; v1@2013.9,1786.84 cw(c2004.94,1776) 2019,1776 ; 2019,1776 cw(c2033.06,1776) v1@2024.1,1786.84 ; 2019,1776 cw(c2033.06,1776) v1@2024.1,1786.84 ; 2019,1776 cw(c2033.06,1776) v1@2024.1,1786.84 ; 2019,1776 cw(c2033.06,1776) v1@2024.1,1786.84 ; 2204.34,1590.66 ccw(c2218,1604.31) 2218,1585 cw(c2218,1604.31) 2204.34,1590.66 ; 2204.34,1590.66 cw(c2190.69,1577) 2210,1577 ccw(c2190.69,1577) 2204.34,1590.66 ; v1@2017,1793 ccw(c2053.21,1793) 2027.61,1767.39 cw(c2053.21,1793) v1@2017,1793 ; v1@2027,1793 ccw(c2087.36,1793) 2044.68,1750.32 cw(c2087.36,1793) v1@2027,1793
IFON: C18.2 U1.1 U1.24 | length 163.4
  Top Layer w10: C18.2@2015,1747.89 2015,1758.62 cw(c2041.62,1732.01) 2041.62,1769.65 U1.1 ; 2066,1769.65 2066,1798.35 cw(c2076.27,1798.35) U1.24 ; 2050.32,1769.65 cw(c2050.32,1743.7) 2068.67,1762.05 ccw(c2050.32,1743.7) 2050.32,1769.65 ; U1.1@2074.46,1769.65 cw(c2074.46,1767.84) 2075.74,1769.12 ccw(c2074.46,1767.84) U1.1@2074.46,1769.65
LIGHT: C6.1 D5.1 R6.1 U6.19 | length 517.7
  Top Layer w7: v1@2118.71,1450.29 2131,1438 cw(c2103.04,1410.04) 2142.58,1410.04 U6.19
  Top Layer w12: C6.1 R6.1 ccw(c2014.1,1466.52) 1925,1466.52 D5.1
  Bottom Layer w12: v1(1939,1501) 2025,1501 cw(c2025,1380.29) 2110.36,1465.64 v1(2127,1449) ; 1955.9,1501 ccw(c1955.9,1484.1) 1943.95,1496.05 cw(c1955.9,1484.1) 1955.9,1501 ; 1955.9,1501 cw(c1955.9,1517.9) 1943.95,1505.95 ccw(c1955.9,1517.9) 1955.9,1501 ; 2115.05,1460.95 ccw(c2127,1472.9) 2127,1456 cw(c2127,1472.9) 2115.05,1460.95 ; 2115.05,1460.95 cw(c2103.1,1449) 2120,1449 ccw(c2103.1,1449) 2115.05,1460.95
NetC3_1: C3.1 R15.1 R16.2 U2.3 | length 257
  Top Layer w16: v1(1660,1176) cw(c1703.97,1132.03) 1703.97,1194.21 U2.3 ; v1@1665.38,1266.08 ccw(c1646,1258) 1646,1279 1681.74,1279 cw(c1681.74,1267.6) 1689.8,1275.66
  Bottom Layer w16: v1(1660,1176) 1660,1241.6 cw(c1694.14,1241.6) v1@1670,1265.74
  other v1: 1670,1268
NetC4_1: C4.1 R2.1 | length 61
  Top Layer w10: C4.1 ccw(c2146.97,1561) 2117.29,1531.32 2119.15,1529.46 ccw(c2142,1552.31) R2.1
NetC8_1: C8.1 R4.2 R14.2 U2.5 | length 237.5
  Top Layer w30: 1805.1,1139.02 cw(c1817.41,1151.33) 1800,1151.33 1800,1216.76 cw(c1810.24,1216.76) 1803,1224 cw(c1821.36,1205.64) 1821.36,1231.61 U2.5 ; R4.2 1807.43,1094 cw(c1807.43,1145.21) C8.1 1791.46,1129.24 cw(c1815.02,1105.68) R14.2
NetC14_1: C14.1 R9.1 | length 85.7
  Top Layer w10: R9.1 2010,1635 cw(c2055,1635) 2055,1680
NetC16_1: C16.1 L1.1 U2.6 | length 127.9
  Top Layer w30: L1.1@1803.27,1382 cw(c1803.27,1351.27) 1825,1373 cw(c1754.99,1302.99) 1854,1302.99 1854,1277
NetC16_2: C16.2 U2.1 | length 73.2
  Top Layer w20: U2.1 1750.3,1287.41 cw(c1776.59,1287.41) 1758,1306 cw(c1777.31,1286.69) 1777.31,1314 C16.2
NetC30_1: C30.1 U6.22 | length 85.4
  Top Layer w7: C30.1 2093.59,1440 cw(c2093.59,1436.59) 2096,1439 cw(c2083.34,1426.34) 2101.24,1426.34 U6.22
NetD2_K: D2.K R30.2 | length 157.8
  Top Layer w12: R30.2 D2.K ; 2595,1489.97 ccw(c2565.29,1489.97) 2586.3,1510.98 cw(c2565.29,1489.97) 2595,1489.97 ; 2595,1489.97 cw(c2624.71,1489.97) 2603.7,1510.98 ccw(c2624.71,1489.97) 2595,1489.97
NetD3_K: D3.K R31.2 | length 157.8
  Top Layer w12: R31.2 D3.K ; 2515,1489.97 ccw(c2485.29,1489.97) 2506.3,1510.98 cw(c2485.29,1489.97) 2515,1489.97 ; 2515,1489.97 cw(c2544.71,1489.97) 2523.7,1510.98 ccw(c2544.71,1489.97) 2515,1489.97
NetR14_1: R14.1 U2.4 | length 50.9
  Top Layer w30: U2.4@1857,1189 cw(c1849.04,1181.04) 1860.3,1181.04 R14.1
NetR20_2: R20.2 U6.44 | length 85
  Top Layer w7: R20.2 ccw(c2149.75,1104.98) 2178,1104.98 2178,1116.66 ccw(c2151.17,1116.66) 2170.14,1135.63 U6.44
NetR36_1: R36.1 U6.17 | length 578.4
  Top Layer w7: v1@2162,1453 cw(c2142.34,1433.34) 2170.14,1433.34 U6.17
  Top Layer w10: 1994,1116 cw(c1994,1067.72) 2028.14,1101.86 2033.69,1096.31 cw(c2006.37,1069) v1(2045,1069)
  Bottom Layer w10: v1(2045,1069) 2052.1,1076.1 ccw(c2028.2,1100) 2062,1100 2062,1290 cw(c2182.71,1290) 2097.36,1375.36 2149.39,1427.39 ccw(c2123.79,1453) v1(2160,1453)
NRST: C21.2 R21.1 T9.1 U6.7 | length 317.9
  Top Layer w7: U6.7@2271,1277.89 2302.01,1277.89 ; 2302.23,1278.11 cw(c2330.93,1249.4) 2330.93,1290 v1(2335,1290)
  Top Layer w12: R21.1 C21.2@2385.48,1407.2 ; C21.2@2385.48,1407.2 ccw(c2385.48,1418.24) 2395.59,1413.81 cw(c2385.48,1418.24) C21.2@2385.48,1407.2 ; C21.2@2375.92,1407.2 ccw(c2375.92,1437.08) 2397.05,1415.95 cw(c2375.92,1437.08) C21.2@2375.92,1407.2
  Bottom Layer w12: v1(2335,1290) ccw(c2335,1314.14) 2352.07,1297.07 ccw(c2289.47,1359.67) T9.1@2378,1359.67 ; T9.1@2392,1368 2392,1386.86 cw(c2426.14,1386.86) v1(2402,1411)
O: P5.2 R17.1 | length 85.3
  Top Layer w20: R17.1 1930,1043.28 ccw(c1998.28,1043.28) P5.2@1950,995
OP1INN: C1.2 R1.1 U1.3 | length 190.1
  Top Layer w10: C1.2 2050.14,1605.41 ccw(c2000.08,1655.47) 2070.87,1655.47 ; R1.1 ccw(c2015.34,1686.28) 2078.5,1686.28 2078.5,1716.5 2103.81,1741.81 U1.3 ; C1.2@2044.72,1602.87 ccw(c2044.72,1609.81) 2049.63,1604.91 cw(c2044.72,1609.81) C1.2@2044.72,1602.87
OP1OUT: C1.1 C4.2 R1.2 U1.4 | length 182.8
  Top Layer w10: C4.2@2061.67,1562.94 ccw(c1981.2,1643.41) 2095,1643.41 ; 2096,1641 cw(c2098.41,1643.41) 2095,1643.41 ; U1.4 ccw(c2118.03,1727.56) 2117.8,1727.8 2117.63,1727.63 ccw(c2172.25,1673) 2095,1673 2095,1643.41
OP2INN: C5.2 R2.2 R3.1 U1.5 | length 161.5
  Top Layer w10: U1.5 ccw(c2131.95,1711.62) 2130.28,1713.28 ccw(c2164.76,1678.8) 2116.7,1687.05 ccw(c2137.84,1687.05) 2122.89,1672.11 2130.53,1664.47 cw(c2107.68,1641.61) R3.1 2140,1570.1 ccw(c2146.83,1570.1) R2.2
OP2INP: C15.1 R11.2 U1.7 | length 187.5
  Top Layer w10: U1.7 cw(c2184.84,1697.38) 2186.73,1699.27 ccw(c2230.18,1699.27) 2199.46,1668.54 2220.99,1647.01 ccw(c2230.67,1656.68) 2230.67,1643 2280.17,1643 ccw(c2280.17,1649.83) C15.1@2285,1645 ; 2233.31,1643 ccw(c2233.31,1655.03) 2241.81,1646.52 cw(c2233.31,1655.03) 2233.31,1643 ; R11.2@2248.19,1646.52 ccw(c2256.69,1655.03) 2256.69,1643 cw(c2256.69,1655.03) R11.2@2248.19,1646.52 ; 2273.97,1643 ccw(c2273.97,1654.09) 2281.81,1646.25 cw(c2273.97,1654.09) 2273.97,1643
OP2OUT: C5.1 C10.1 R3.2 R5.1 U1.6 U6.16 | length 493.9
  Top Layer w7: U6.16 2183.92,1406.5 ccw(c2183.73,1406.69) 2184,1406.69 2184,1484.59 cw(c2187.41,1484.59) 2185,1487
  Top Layer w10: R5.1 C10.1 ccw(c2073.9,1485.51) 2073.9,1480 2178,1480 ccw(c2178,1487) 2184,1483.39 ccw(c2178,1487) 2185,1487 2185,1605.58 ccw(c2064.92,1605.58) 2149.83,1690.49 cw(c2159.39,1700.05) U1.6
OPCAP: C14.2 U1.2 | length 69.3
  Top Layer w10: 2055,1725.28 cw(c2074.72,1725.28) 2074.72,1745 ; U1.2 2079.46,1745 2074.72,1745 ; 2074.72,1745 ccw(c2074.72,1754.17) 2082.47,1749.26 cw(c2074.72,1754.17) 2074.72,1745
OUT: R17.2 U6.29 | length 522.6
  Top Layer w7: v1(1991,1291) cw(c1992.62,1289.38) 1992.62,1291.67 U6.29 ; v1@1997.72,1284.28 cw(c2015.55,1266.45) 2015.55,1291.67 ccw(c2015.55,1266.45) v1@1997.72,1284.28 ; v1@1997.72,1297.72 ccw(c2012.32,1312.32) 2012.32,1291.67 cw(c2012.32,1312.32) v1@1997.72,1297.72
  Top Layer w12: R17.2@1930,1118 1930,1141.17 cw(c1936.83,1141.17) v1(1932,1146) ; 1930,1124.27 cw(c1953.73,1124.27) 1936.95,1141.05 ccw(c1953.73,1124.27) 1930,1124.27
  Bottom Layer w7: v1(1932,1146) cw(c1936.83,1141.17) 1936.83,1148 2021.03,1148 ccw(c2021.03,1162.41) 2031.22,1152.22 ccw(c2000.37,1183.07) 2044,1183.07 ccw(c1998.3,1183.07) 2030.62,1215.38 2016.46,1229.54 cw(c2077.91,1291) v1(1991,1291) ; v1@1938.72,1139.28 cw(c1959.76,1118.24) 1959.76,1148 ccw(c1959.76,1118.24) v1@1938.72,1139.28 ; v1@1938.72,1152.72 ccw(c1950.11,1164.11) 1950.11,1148 cw(c1950.11,1164.11) v1@1938.72,1152.72
OUT1: P5.3 R36.2 | length 253.8
  Top Layer w20: R36.2 ccw(c2047.45,1074.72) 2010.36,1037.64 2044.05,1003.95 ccw(c2056,1015.9) P5.3@2056,999 ; 2022.44,1025.56 ccw(c2060,1063.11) 2060,1010 cw(c2060,1063.11) 2022.44,1025.56 ; 2027.27,1020.73 cw(c1996.54,990) 2040,990 ccw(c1996.54,990) 2027.27,1020.73
PULSE: U1.11 U6.42 | length 842.4
  Top Layer w7: U6.42@2142.58,1151 2142.58,1128.42 v1@2150,1121
  Top Layer w10: U1.11 ccw(c2241.12,1755.73) 2240.7,1755.3 2249.27,1746.73 ccw(c2280,1777.46) v1(2280,1734)
  Bottom Layer w10: v1(2151,1122) 2137.36,1135.64 ; v1(2280,1734) cw(c2246.2,1700.2) 2294,1700.2 2294,1541 cw(c2219.16,1541) 2272.08,1488.08 2137.36,1353.36 ccw(c2222.71,1268) 2102,1268 2102,1221 ccw(c2222.71,1221) 2137.36,1135.64 ; 2137.36,1135.64 ccw(c2150.98,1149.27) 2150.99,1130 cw(c2150.98,1149.27) 2137.36,1135.64 ; 2137.36,1135.64 cw(c2123.73,1122.02) 2143,1122.01 ccw(c2123.73,1122.02) 2137.36,1135.64
RED_LED: R30.1 U6.11 | length 348.5
  Top Layer w7: U6.11@2268,1333 2284.99,1333 ; 2285.23,1333.23 2293.69,1341.69 cw(c2345.14,1290.24) 2345.14,1363 2479.03,1363 ccw(c2479.03,1403.97) 2508,1375 cw(c2524.9,1358.1) 2524.9,1382 2527.4,1382 ccw(c2527.4,1477.6) R30.1
RX2: U1.21
SWCLK: P2.2 U6.37 | length 1196.3
  Top Layer w7: 2071,1142.96 cw(c2080.27,1142.96) U6.37@2073.72,1149.51 ; U6.37@2071,1154 2071,1137.87 ccw(c2135.87,1137.87) 2090,1092 2091.64,1090.36 ccw(c2177,1175.71) 2177,1055 2670.86,1055 ccw(c2670.86,1089.14) P2.2 ; 2606.88,1055 ccw(c2606.88,1153.12) 2676.26,1083.74 cw(c2606.88,1153.12) 2606.88,1055 ; 2623.78,1055 ccw(c2623.78,1136.22) 2681.21,1078.79 cw(c2623.78,1136.22) 2623.78,1055 ; 2640.68,1055 ccw(c2640.68,1119.32) 2686.16,1073.84 cw(c2640.68,1119.32) 2640.68,1055 ; 2655.17,1055 cw(c2655.17,1025.17) 2676.26,1046.26 ccw(c2655.17,1025.17) 2655.17,1055 ; 2657.58,1055 ccw(c2657.58,1102.42) 2691.11,1068.89 cw(c2657.58,1102.42) 2657.58,1055
SWDIO: P2.3 U6.34 | length 1065.4
  Top Layer w7: U6.34 2013.97,1222.77 ccw(c2013.97,1210.22) 2005.09,1219.09 2000.43,1214.43 ccw(c2032.87,1182) 1987,1182 ccw(c2015.97,1182) 1995.49,1161.51 2118,1039 2594.64,1039 cw(c2594.64,1021.24) 2607.2,1033.8 v1(2616,1025)
  Bottom Layer w7: v1(2616,1025) 2616,1059 ; 2616,1047.93 ccw(c2638.93,1047.93) 2622.72,1031.72 cw(c2638.93,1047.93) 2616,1047.93 ; 2616,1047.93 cw(c2593.07,1047.93) 2609.28,1031.72 ccw(c2593.07,1047.93) 2616,1047.93
  Bottom Layer w12: v1(2616,1025) 2616,1060.75 cw(c2725.25,1060.75) 2648,1138 2660.86,1150.86 cw(c2695,1116.72) P2.3
TPVBG: C9.2 U1.18 | length 132.6
  Top Layer w10: U1.18 ccw(c2184.84,1879.38) 2186,1879.38 2186,1935.72 cw(c2190.28,1935.72) C9.2 ; 2186,1901.37 ccw(c2207.99,1901.37) 2192.44,1885.82 cw(c2207.99,1901.37) 2186,1901.37 ; 2186,1928.31 cw(c2198.03,1928.31) 2189.52,1936.81 ccw(c2198.03,1928.31) 2186,1928.31 ; 2186,1931.77 cw(c2191.53,1931.77) 2189.98,1937.08 ccw(c2191.53,1931.77) 2186,1931.77
TXN: U1.16
USART2_RX: U6.13
USART2_TX: U6.12
USART_RX: P2.5 U6.2 | length 803.6
  Top Layer w7: U6.2@2271,1208.99 2308.74,1208.99 cw(c2308.74,1140.73) 2357,1189 cw(c2335.27,1167.27) 2366,1167.27 ; v1@2356.47,1148.72 ccw(c2343.19,1167.27) 2366,1167.27 ; v1@2360.54,1143.03 ccw(c2352.94,1153.65) 2366,1153.65 ; v1(2362,1141) ccw(c2352.34,1150.66) 2366,1150.66 2366,1167.27 ; 2366,1154.28 ccw(c2375.28,1154.28) v1@2368.72,1147.72
  Bottom Layer w12: v1@2358.46,1144.54 cw(c2374.07,1128.93) 2374.07,1151 ; v1(2362,1141) 2372,1151 2491,1151 ccw(c2491,1271.71) 2576.36,1186.36 2598.01,1208.01 ccw(c2528.02,1278) 2627,1278 cw(c2709.08,1278) 2651.04,1336.04 2669.39,1354.39 cw(c2695,1328.79) P2.5 ; v1@2366.95,1136.05 cw(c2403.04,1099.96) 2403.04,1151 ; 2658.79,1343.79 cw(c2684.08,1318.49) 2692.26,1353.32 ccw(c2684.08,1318.49) 2658.79,1343.79 ; 2664.64,1349.64 ccw(c2649.27,1365) 2671,1365 cw(c2649.27,1365) 2664.64,1349.64
USART_TX: P2.6 U6.1 | length 691.5
  Top Layer w7: U6.1@2264,1194 2308.54,1194 cw(c2308.54,1168.76) 2326.39,1186.61 cw(c2317.69,1177.9) 2330,1177.9 2330,1165.49 cw(c2309.51,1165.49) 2324,1151 cw(c2319.17,1155.83) 2319.17,1149 v1(2314,1149)
  Bottom Layer w12: v1(2314,1149) cw(c2371.94,1091.06) 2371.94,1173 2486.4,1173 ccw(c2486.4,1268.6) 2554,1201 2576.59,1223.59 ccw(c2503.19,1297) 2607,1297 2607,1343 cw(c2727.71,1343) 2642.36,1428.36 2651.79,1437.79 cw(c2703,1386.57) P2.6@2703,1459
VBPA: R18.2 R19.1 U1.14 | length 526
  Top Layer w10: U1.14@2240.56,1822.56 2247.22,1829.22 cw(c2266,1810.44) 2266,1837 cw(c2266,1783.89) 2303.56,1821.44 2312.47,1812.53 cw(c2233.95,1734) v1(2345,1734) ; R18.2@2342,1534 2377.59,1534 ccw(c2377.59,1537.41) R19.1 ; 2366.1,1534.53 2366.1,1549.16 cw(c2382.84,1549.16) v1(2371,1561) ; 2366.1,1534.08 cw(c2392.64,1534.08) 2376.01,1554.76 ccw(c2392.64,1534.08) 2366.1,1534.08
  Bottom Layer w10: v1(2345,1734) 2345,1623.77 ccw(c2433.77,1623.77) v1(2371,1561) ; 2345,1714.69 ccw(c2325.69,1714.69) 2339.34,1728.34 cw(c2325.69,1714.69) 2345,1714.69 ; 2345,1714.69 cw(c2364.31,1714.69) 2350.66,1728.34 ccw(c2364.31,1714.69) 2345,1714.69
VCTRL: C13.1 R7.2 R8.1 U1.8 | length 431.3
  Top Layer w10: U1.8 cw(c2198.76,1713.33) 2199.21,1713.79 2227,1686 v1(2227,1678) ; v1@2221.22,1515.22 cw(c2240,1496.44) 2240,1523 2240,1462.74 cw(c2221.99,1462.74) R7.2 ; U1.8@2207.69,1705.31 cw(c2180.37,1678) 2219,1678 ccw(c2180.37,1678) U1.8@2207.69,1705.31 ; R8.1@2235.75,1486.81 cw(c2225.5,1476.56) 2240,1476.56 ccw(c2225.5,1476.56) R8.1@2235.75,1486.81 ; R8.1@2235.75,1493.19 ccw(c2225.5,1503.44) 2240,1503.44 cw(c2225.5,1503.44) R8.1@2235.75,1493.19
  Bottom Layer w10: v1(2217,1511) ccw(c2137.33,1590.67) 2250,1590.67 2250,1622.47 ccw(c2176.3,1622.47) 2228.41,1674.59 cw(c2231.83,1678) v1(2227,1678)
XTALA: C23.2 U6.5 Y1.1 | length 344.1
  Top Layer w7: U6.5@2272,1250.33 2342.48,1250.33 cw(c2342.48,1218.48) 2365,1241 2391.03,1214.97 cw(c2333.81,1157.76) 2414.72,1157.76 C23.2 ; 2375.43,1230.57 ccw(c2408.79,1263.92) 2408.79,1216.75 cw(c2408.79,1263.92) 2375.43,1230.57 ; 2387.38,1218.62 ccw(c2408.79,1240.02) 2408.79,1209.75 cw(c2408.79,1240.02) 2387.38,1218.62 ; 2393.03,1212.97 cw(c2384.57,1204.5) 2396.54,1204.5 ccw(c2384.57,1204.5) 2393.03,1212.97
XTALB: C24.2 U6.6 Y1.3 | length 426.7
  Top Layer w7: U6.6@2272,1264.11 2329,1264.11 ; 2325.96,1264.33 ccw(c2325.96,1308.68) 2357.32,1277.32 2367,1287 cw(c2405.63,1248.37) 2405.63,1303 2449,1303 cw(c2449,1252.3) 2484.85,1288.15 2494.49,1278.51 ccw(c2510.21,1294.24) 2510.21,1272 ccw(c2510.21,1256.62) Y1.3 ; 2484.35,1288.65 cw(c2473.39,1277.69) 2486.89,1270.07 ccw(c2473.39,1277.69) 2484.35,1288.65
  Top Layer w12: Y1.3@2510.21,1272 C24.2 ; Y1.3@2514.11,1260.6 cw(c2541.62,1233.09) 2541.62,1272 ccw(c2541.62,1233.09) Y1.3@2514.11,1260.6
pads on no net: U1.19 U6.3 U6.4 U6.20 U6.21 U6.25 U6.26 U6.27 U6.28 U6.30 U6.31 U6.32 U6.33 U6.38 U6.39 U6.40 U6.43 U6.45 U6.46 Y1.2 Y1.4

## Polygon pours and split planes (outlines as drawn)
GND on Bottom Layer "Top Layer-No Net" (solid, remove dead copper, pour order 1000): 1579.4,2092.56 2753.3,2092.56 2753.3,910.95 1572.2,910.95 1572.2,2092.56 1579.4,2092.56

## Keep-outs
Keep-Out Layer:
  the board outline again, w10

## Other copper
Top Layer:
  region net TXN: 2221.87,1869.04 cw(c2231.33,1859.57) 2231.33,1872.96 2383.89,1872.96 2532.39,2034.26 2714.86,1866.26 2560.2,1698.27 2384.99,1859.57 2231.33,1859.57 2216.86,1846.21 2208.5,1854.56
  region net RX2: 2108.84,1869.04 ccw(c2099.38,1859.57) 2099.38,1872.96 1946.82,1872.96 1798.32,2034.26 1615.85,1866.26 1770.51,1698.27 1945.71,1859.57 2099.38,1859.57 2113.85,1846.21 2122.2,1854.56

## Silkscreen, mask and mechanical layers (free items; w line width, h text height)
Top Overlay:
  circle w20: c2295,1128 r13.34
  circle w20: c2382,1186 r6
  lines w8: 2034,1643 2034,1637.31 ccw(c2061.31,1637.31) 2042,1618 ; 2206,1485 cw(c2208.41,1485) 2206.71,1486.71 2212.27,1492.27 cw(c2221.28,1483.26) 2221.28,1496 ; 2246,1661 2246,1682 ; 2272.23,1662.95 cw(c2282,1653.18) 2282,1667 2302,1667 ; 2304,1533 ccw(c2308.83,1533) 2305.41,1529.59 cw(c2296.76,1520.93) 2309,1520.93 ; 2305,1560 2367.27,1560 ccw(c2367.27,1590.73) 2389,1569
  lines w10: 1970,1651 ccw(c1986.9,1651) 1974.95,1639.05 1975,1639 ccw(c1987.74,1651.74) 1987.74,1633.72 1992,1633.72 ; 2002,1516 ccw(c2004.41,1518.41) 2004.41,1515 2011,1515 ; 2105.81,1543 2105.81,1535.46 ccw(c2106.46,1535.46) 2106,1535 ; 2160,1550 ccw(c2178.62,1550) 2165.45,1536.84 ; 2169.72,1583.61 cw(c2169.72,1569.95) 2179.39,1579.61 2185,1574
  lines w15: 1594,1353 1624,1353
  text "PH10ED3030D" at 1990,2025 h60
  text "21.11.03" at 1990,1970 h60
  text "Phosense" at 1609,1669 h70
  text "TX" at 2656,1397 h60
  text "RX" at 2658,1296 h60
  text "GND" at 2635,1200 h60
  text "DIO" at 2651,1097 h60
  text "CLK" at 2516,1033 h60
  text "O1" at 1984,1010 h60
  text "A2" at 2275,1010 h60
  text "A1" at 2175,1009 h60
  text "O" at 1908,1007 h60
  text "G" at 2381,1006 h60
  text "V" at 1815,1005 h60
  text "3.3V" at 2518,933 h60

## Text inside footprints (layer, text, board x,y; h text height)
D5: Top Overlay "+" at 1867,1505 h39.37 r270